# EAGLE board CT_schematic (EAGLE 7.6.0)

Size 100 x 80 mm. Coordinates in mm from the lower left corner, seen from the top.
Outline: 0,0 100,0 100,80 0,80 0,0
Copper layers (1*16): Top 0.035mm / dielectric 1.5mm / Bottom 0.035mm
Design rules "default": minimum track width 10mil, minimum drill 24mil, track to track 8mil, track to pad 8mil, pad to pad 8mil, via to via 8mil, smd to smd 8mil, copper to edge 40mil, drill to drill 8mil, minimum pad ring 10mil, minimum via ring 8mil, stop-mask expansion 4mil, vias tented up to drill 0mil, thermal gap 10mil

## Footprints (pad centres in the part's own frame; a part is rotated, then mirrored left to right if it is on the bottom)
C0603 = smd 0.8 x 0.8: 1 -0.762,0; 2 0.762,0
C0402 = smd 0.5 x 0.5: 1 -0.508,0; 2 0.508,0
C0805 = smd 1.2 x 1.3: 1 -1.016,0; 2 1.016,0
C1206 = smd 1.3 x 1.6: 1 -1.524,0; 2 1.524,0
L0603 = smd 0.8 x 0.8: 1 -0.762,0; 2 0.762,0
L0805 = smd 1.2 x 1.3: 1 -1.016,0; 2 1.016,0
R0603 = smd 0.8 x 0.8: 1 -0.762,0; 2 0.762,0
LQFP48 = smd 0.3 x 1.2: 1 -2.75,-4.25; 2 -2.25,-4.25; 3 -1.75,-4.25; 4 -1.25,-4.25; 5 -0.75,-4.25; 6 -0.25,-4.25; 7 0.25,-4.25; 8 0.75,-4.25; 9 1.25,-4.25; 10 1.75,-4.25; 11 2.25,-4.25; 12 2.75,-4.25; 25 2.75,4.25; 26 2.25,4.25; 27 1.75,4.25; 28 1.25,4.25; 29 0.75,4.25; 30 0.25,4.25; 31 -0.25,4.25; 32 -0.75,4.25; 33 -1.25,4.25; 34 -1.75,4.25; 35 -2.25,4.25; 36 -2.75,4.25 | smd 1.2 x 0.3: 13 4.25,-2.75; 14 4.25,-2.25; 15 4.25,-1.75; 16 4.25,-1.25; 17 4.25,-0.75; 18 4.25,-0.25; 19 4.25,0.25; 20 4.25,0.75; 21 4.25,1.25; 22 4.25,1.75; 23 4.25,2.25; 24 4.25,2.75; 37 -4.25,2.75; 38 -4.25,2.25; 39 -4.25,1.75; 40 -4.25,1.25; 41 -4.25,0.75; 42 -4.25,0.25; 43 -4.25,-0.25; 44 -4.25,-0.75; 45 -4.25,-1.25; 46 -4.25,-1.75; 47 -4.25,-2.25; 48 -4.25,-2.75
TST-110-05-T-D-RA = drill 1 pad 1.7 square: 1 0,0 | drill 1 pad 1.7: 2 0,2.54; 3 2.54,0; 4 2.54,2.54; 5 5.08,0; 6 5.08,2.54; 7 7.62,0; 8 7.62,2.54; 9 10.16,0; 10 10.16,2.54; 11 12.7,0; 12 12.7,2.54; 13 15.24,0; 14 15.24,2.54; 15 17.78,0; 16 17.78,2.54; 17 20.32,0; 18 20.32,2.54; 19 22.86,0; 20 22.86,2.54
SOIC-8 = smd 1.6 x 0.6: 1 -2.7,1.905 | smd 1.55 x 0.6: 2 -2.7,0.635; 3 -2.7,-0.635; 4 -2.7,-1.905; 5 2.7,-1.905; 6 2.7,-0.635; 7 2.7,0.635; 8 2.7,1.905
182-009-MALE = drill 1.194 pad 1.524 octagon: 1 -5.537,10.923; 2 -2.769,10.923; 3 0,10.923; 4 2.769,10.923; 5 5.537,10.923; 6 -4.153,8.08; 7 -1.384,8.08; 8 1.384,8.08; 9 4.153,8.08 | hole 3.048: -12.446,9.501; 12.446,9.501
TSSOP20-I = smd 0.4 x 1.35: 1 -2.925,-2.875; 2 -2.275,-2.875; 3 -1.625,-2.875; 4 -0.975,-2.875; 5 -0.325,-2.875; 6 0.325,-2.875; 7 0.975,-2.875; 8 1.625,-2.875; 9 2.275,-2.875; 10 2.925,-2.875; 11 2.925,2.875; 12 2.275,2.875; 13 1.625,2.875; 14 0.975,2.875; 15 0.325,2.875; 16 -0.325,2.875; 17 -0.975,2.875; 18 -1.625,2.875; 19 -2.275,2.875; 20 -2.925,2.875
HTSS-105-01-G-D = drill 1 pad 1.8 square: 1 0,0 | drill 1 pad 1.8: 2 0,2.54; 3 2.54,0; 4 2.54,2.54; 5 5.08,0; 6 5.08,2.54; 7 7.62,0; 8 7.62,2.54; 9 10.16,0; 10 10.16,2.54
FCI_10118193-0001LF = smd 0.4 x 1.35: 1 -1.3,2.675; 2 -0.65,2.675; 3 0,2.675; 4 0.65,2.675; 5 1.3,2.675 | smd 1.6 x 1.4: 6 -3.2,2.45; 7 3.2,2.45 | smd 1.9 x 1.9: 8 -1.2,0; 9 1.2,0 | hole 0.5: -3.3,0; 3.3,0
SOT143B = smd 1 x 0.7: 1 -0.75,-1 | smd 0.6 x 0.7: 2 0.95,-1; 3 0.95,1; 4 -0.95,1
ABLS-25.000MHZ-B2F-T = smd 5.6 x 2.8: 1 -3.81,0; 2 5.69,0
ASEK = smd 1.4 x 1: 1 -1.1,-0.8; 2 1.1,-0.8; 3 1.1,0.8; 4 -1.1,0.8
TSOT-23-5 = smd 1.3 x 0.62: 1 -1.31,0.95; 2 -1.31,0; 3 -1.31,-0.95; 4 1.31,-0.95; 5 1.31,0.95
DFN8_2X3MC = smd 0.813 x 0.305: 1 -1.398,0.75; 2 -1.398,0.25; 3 -1.398,-0.25; 4 -1.398,-0.75; 5 1.398,-0.75; 6 1.398,-0.25; 7 1.398,0.25; 8 1.398,0.75 | smd 1.753 x 1.549: 9 0,0
JST-2-SMD = smd 1 x 4.6: 1 -1,-3.7; 2 1,-3.7 | smd 1.6 x 3.4: NC1 -3.4,1.5; NC2 3.4,1.5
SON-6 = smd 0.55 x 0.3: 1 -0.355,0.5 | smd 0.52 x 0.3: 2 -0.37,0; 3 -0.37,-0.5; 4 0.37,-0.5; 5 0.37,0; 6 0.37,0.5
SW_4-1437565-2 = smd 1.4 x 2.1: 1 -2.23,4.55; 2 -2.23,-4.55; 3 2.23,4.55; 4 2.23,-4.55
LGM67K-G1J2-24-Z = smd 0.8 x 1.4: A -2,0; C 0,0
NC7SZ125M5X = smd 1.3 x 0.7: 1 -1.3,0.95; 2 -1.3,0; 3 -1.3,-0.95; 4 1.3,-0.95; 5 1.3,0.95
DUMMY_PACKAGE_149 = drill 0.3: 1 0,-1; 2 1.5,-1

## Placement (x,y rotation side)
C1  1e-06  [C0603]  -53.34,67.31 0 top  (outside the outline)
C2  1e-07  [C0603]  -57.15,67.31 0 top  (outside the outline)
C3  1e-07  [C0603]  -60.96,67.31 0 top  (outside the outline)
C4  1e-07  [C0603]  -64.77,67.31 0 top  (outside the outline)
C5  1e-07  [C0603]  -68.58,67.31 0 top  (outside the outline)
C6  1e-07  [C0603]  -72.39,67.31 0 top  (outside the outline)
C7  4.7e-06  [C0603]  -49.53,67.31 0 top  (outside the outline)
C8  1e-08  [C0603]  -15.24,72.39 0 top  (outside the outline)
C9  1e-06  [C0603]  -19.05,72.39 0 top  (outside the outline)
C10  1e-11  [C0402]  -49.53,72.39 0 top  (outside the outline)
C11  1e-11  [C0402]  -53.34,72.39 0 top  (outside the outline)
C12  1e-07  [C0402]  -57.15,72.39 0 top  (outside the outline)
C13  1e-07  [C0402]  -60.96,72.39 0 top  (outside the outline)
C14  1e-07  [C0402]  -64.77,72.39 0 top  (outside the outline)
C15  1e-07  [C0402]  -68.58,72.39 0 top  (outside the outline)
C16  1e-07  [C0402]  -72.39,72.39 0 top  (outside the outline)
C17  1e-07  [C0402]  -15.24,77.47 0 top  (outside the outline)
C18  1e-07  [C0402]  -19.05,77.47 0 top  (outside the outline)
C19  1e-07  [C0402]  -22.86,77.47 0 top  (outside the outline)
C20  1e-07  [C0402]  -26.67,77.47 0 top  (outside the outline)
C21  1e-08  [C0402]  -30.48,77.47 0 top  (outside the outline)
C22  1e-05  [C0805]  -73.66,54.61 0 top  (outside the outline)
C23  1e-05  [C0805]  -15.24,62.23 0 top  (outside the outline)
C24  1e-07  [C0402]  -34.29,77.47 0 top  (outside the outline)
C25  1e-05  [C1206]  -49.53,54.61 0 top  (outside the outline)
C26  1e-05  [C1206]  -55.88,54.61 0 top  (outside the outline)
C27  1e-08  [C0402]  -38.1,77.47 0 top  (outside the outline)
C28  1e-08  [C0402]  -41.91,77.47 0 top  (outside the outline)
F1  240.0  [L0603]  -22.86,72.39 0 top  (outside the outline)
I1  2.2e-06  [L0805]  -20.32,62.23 0 top  (outside the outline)
R1  10000.0  [R0603]  -58.42,62.23 0 top  (outside the outline)
R2  1000.0  [R0603]  -26.67,72.39 0 top  (outside the outline)
R3  1600.5  [R0603]  -30.48,72.39 0 top  (outside the outline)
R4  4700.0  [R0603]  -34.29,72.39 0 top  (outside the outline)
R5  10000.0  [R0603]  -63.5,62.23 0 top  (outside the outline)
R6  10000.0  [R0603]  -68.58,62.23 0 top  (outside the outline)
R7  10000.0  [R0603]  -73.66,62.23 0 top  (outside the outline)
R8  10000.0  [R0603]  -15.24,67.31 0 top  (outside the outline)
R9  10000.0  [R0603]  -20.32,67.31 0 top  (outside the outline)
R10  10000.0  [R0603]  -25.4,67.31 0 top  (outside the outline)
R11  10000.0  [R0603]  -30.48,67.31 0 top  (outside the outline)
R12  120.0  [R0603]  -38.1,72.39 0 top  (outside the outline)
R13  100000.0  [R0603]  -38.1,62.23 0 top  (outside the outline)
R14  220000.0  [R0603]  -43.18,62.23 0 top  (outside the outline)
R15  1000000.0  [R0603]  -33.02,62.23 0 top  (outside the outline)
R16  10000.0  [R0603]  -35.56,67.31 0 top  (outside the outline)
R17  10000.0  [R0603]  -40.64,67.31 0 top  (outside the outline)
R18  9100.0  [R0603]  -41.91,72.39 0 top  (outside the outline)
R19  680000.0  [R0603]  -48.26,62.23 0 top  (outside the outline)
R20  120000.0  [R0603]  -53.34,62.23 0 top  (outside the outline)
R21  2000.0  [R0603]  -45.72,72.39 0 top  (outside the outline)
R22  10000.0  [R0603]  -45.72,67.31 0 top  (outside the outline)
U1  STM32F302C6T6  [LQFP48]  -54.61,27.94 0 top  (outside the outline)
U2  TST-110-05-T-D-RA  [TST-110-05-T-D-RA]  -46.99,45.72 0 top  (outside the outline)
U3  SN65HVD230D  [SOIC-8]  -40.64,38.1 0 top  (outside the outline)
U4  182-009-113R531  [182-009-MALE]  -36.83,6.35 0 top  (outside the outline)
U5  SP3203ECY-L/TR  [TSSOP20-I]  -24.13,27.94 0 top  (outside the outline)
U6  HTSS-105-01-G-D  [HTSS-105-01-G-D]  -27.94,38.1 0 top  (outside the outline)
U7  10118193-0001LF  [FCI_10118193-0001LF]  -50.8,36.83 0 top  (outside the outline)
U8  prtr5v0u2ax  [SOT143B]  -54.61,77.47 0 top  (outside the outline)
U9  ABLS-25.000MHZ-B2F-T  [ABLS-25.000MHZ-B2F-T]  -26.67,55.88 0 top  (outside the outline)
U10  ASEK-32.768KHz-ECST  [ASEK]  -66.04,48.26 0 top  (outside the outline)
U11  ltc3406es5  [TSOT-23-5]  -25.4,62.23 0 top  (outside the outline)
U12  MCP73831T-2ACI/MC  [DFN8_2X3MC]  -68.58,76.2 0 top  (outside the outline)
U13  S2B-PH-SM4-TB(LF)(SN)  [JST-2-SMD]  -38.1,29.21 0 top  (outside the outline)
U14  TPS3895ADRYR  [SON-6]  -62.23,76.2 0 top  (outside the outline)
U15  4-1437565-2  [SW_4-1437565-2]  -67.31,6.35 0 top  (outside the outline)
U16  Q65110A2395  [LGM67K-G1J2-24-Z]  -38.1,55.88 0 top  (outside the outline)
U17  nc7sz125m5x  [NC7SZ125M5X]  -60.96,54.61 0 top  (outside the outline)
U18  nc7sz125m5x  [NC7SZ125M5X]  -67.31,54.61 0 top  (outside the outline)
U19  Dummy  [DUMMY_PACKAGE_149]  -59.69,77.47 0 top  (outside the outline)

## Library data of the parts
C1-C28 F1 I1 R1-R22 U1-U19 = circuit_tree

## Nets
CLK_CRYSTAL_U1_5: C10.1 U1.5 U9.1
CLK_CRYSTAL_U1_6: C11.1 U1.6 U9.2
CLK_U1_3: U1.3 U10.3
GND: C1.2 C2.2 C3.2 C4.2 C5.2 C6.2 C7.2 C8.2 C9.2 C10.2 C11.2 C12.2 C13.2 C14.2 C15.2 C16.2 C19.2 C20.2 C21.2 C22.2 C23.1 C23.2 C24.2 C25.2 C26.2 C27.2 C28.2 R2.2 R5.2 R11.2 R13.2 R14.2 R18.2 R20.2 R21.2 U1.8 U1.23 U1.35 U1.47 U2.4 U2.6 U2.8 U2.10 U2.12 U2.14 U2.16 U2.18 U2.20 U3.2 U4.5 U5.18 U6.9 U7.5 U7.6 U7.7 U7.8 U7.9 U8.1 U10.2 U11.2 U12.6 U12.9 U13.2 U14.2 U16.C U17.2 U17.3 U18.1 U18.3 U19.1
INPUT_USBPOWER_5V: C25.1 R22.2 U7.1 U8.4 U12.1 U12.2
NET_U1_7: R4.1 U1.7 U18.4
NET_U1_9: C8.1 C9.1 F1.1 U1.9
NET_U1_42: R3.1 U1.42 U16.A
NET_U1_43: R1.1 U1.43 U15.3 U15.4
NET_U1_44: R5.1 U1.44
NET_U2_19: R11.1 U2.19
NET_U3_6: R12.2 U3.6
NET_U3_8: R13.1 U3.8
NET_U4_2: R12.2 U3.6 U4.2
NET_U4_3: R12.1 U3.7 U4.3
NET_U5_1: C17.1 U5.1
NET_U5_2: C19.1 U5.2
NET_U5_3: C17.2 U5.3
NET_U5_4: C18.1 U5.4
NET_U5_5: C18.2 U5.5
NET_U5_6: C20.1 U5.6
NET_U5_20: U5.20
NET_U6_3: U5.14 U6.3
NET_U6_4: U5.13 U6.4
NET_U6_5: U5.17 U6.5
NET_U6_6: U5.16 U6.6
NET_U11_1: U11.1
NET_U11_3: I1.1 U11.3
NET_U11_5: R14.1 R15.1 U11.5
NET_U11_ATNET_3: I1.2 R15.2
NET_U12_5: R22.1 U12.5
NET_U12_8: R21.1 U12.8
NET_U14_1: R17.1 R18.1 U14.1
NET_U14_3: R19.2 R20.1 U14.3
NET_U14_4: R16.1 U14.4 U17.4 U18.2
NET_U15_1: R2.1 U15.1 U15.2
PROC_CAN_RX: U1.45 U3.4
PROC_CAN_TX: U1.46 U3.1
PROC_DAC_OUT1: U1.14 U19.2
PROC_SYS_JTCK_SWCLK: R9.1 U1.37 U2.9
PROC_SYS_JTDI: R7.1 U1.38 U2.5
PROC_SYS_JTDO_TRACESWO: U1.39 U2.13
PROC_SYS_JTMS_SWDIO: R8.1 U1.34 U2.7
PROC_SYS_NJTRST: R6.1 U1.40 U2.3
PROC_USART2_CTS: U1.10 U5.8
PROC_USART2_RTS: U1.11 U5.10
PROC_USART2_RX: U1.13 U5.11
PROC_USART2_TX: U1.12 U5.7
PROC_USB_DM: U1.32 U7.2 U8.3
PROC_USB_DP: U1.33 U7.3 U8.2
RST_OUT_U2_SRESET_B: R10.1 U2.15 U17.1
VCC_S1_3V7: C22.1 C26.1 U11.4 U12.3 U12.4 U13.1
VCC_TIER1_3V3: C1.1 C2.1 C3.1 C4.1 C5.1 C6.1 C7.1 C12.1 C13.1 C14.1 C15.1 C16.1 C21.1 C23.2 C24.1 C27.1 C28.1 F1.2 I1.2 R1.2 R3.2 R4.2 R6.2 R7.2 R8.2 R9.2 R10.2 R15.2 R16.2 R17.2 R19.1 U1.1 U1.24 U1.36 U1.48 U2.1 U2.2 U3.3 U5.12 U5.19 U10.4 U14.6 U17.5 U18.5

## Tracks (layer width: path | path; a pad name or v marks a point on that pad's centre or on a via)
CLK_CRYSTAL_U1_5  (2 unrouted)
CLK_CRYSTAL_U1_6  (2 unrouted)
CLK_U1_3  (1 unrouted)
GND  (69 unrouted)
INPUT_USBPOWER_5V  (5 unrouted)
NET_U1_7  (2 unrouted)
NET_U1_9  (3 unrouted)
NET_U1_42  (2 unrouted)
NET_U1_43  (3 unrouted)
NET_U1_44  (1 unrouted)
NET_U2_19  (1 unrouted)
NET_U3_6  (1 unrouted)
NET_U3_8  (1 unrouted)
NET_U4_2  (2 unrouted)
NET_U4_3  (2 unrouted)
NET_U5_1  (1 unrouted)
NET_U5_2  (1 unrouted)
NET_U5_3  (1 unrouted)
NET_U5_4  (1 unrouted)
NET_U5_5  (1 unrouted)
NET_U5_6  (1 unrouted)
NET_U6_3  (1 unrouted)
NET_U6_4  (1 unrouted)
NET_U6_5  (1 unrouted)
NET_U6_6  (1 unrouted)
NET_U11_3  (1 unrouted)
NET_U11_5  (2 unrouted)
NET_U11_ATNET_3  (1 unrouted)
NET_U12_5  (1 unrouted)
NET_U12_8  (1 unrouted)
NET_U14_1  (2 unrouted)
NET_U14_3  (2 unrouted)
NET_U14_4  (3 unrouted)
NET_U15_1  (2 unrouted)
PROC_CAN_RX  (1 unrouted)
PROC_CAN_TX  (1 unrouted)
PROC_DAC_OUT1  (1 unrouted)
PROC_SYS_JTCK_SWCLK  (2 unrouted)
PROC_SYS_JTDI  (2 unrouted)
PROC_SYS_JTDO_TRACESWO  (1 unrouted)
PROC_SYS_JTMS_SWDIO  (2 unrouted)
PROC_SYS_NJTRST  (2 unrouted)
PROC_USART2_CTS  (1 unrouted)
PROC_USART2_RTS  (1 unrouted)
PROC_USART2_RX  (1 unrouted)
PROC_USART2_TX  (1 unrouted)
PROC_USB_DM  (2 unrouted)
PROC_USB_DP  (2 unrouted)
RST_OUT_U2_SRESET_B  (2 unrouted)
VCC_S1_3V7  (5 unrouted)
VCC_TIER1_3V3  (43 unrouted)